# Altium PCB Badusb.PcbDoc
Units mm, origin at the board's own origin, x right, y up, seen from the top; angles counter-clockwise.
Board outline 20.91 x 42 mm, 2 copper layers (Top Layer, Bottom Layer); 5 components, 16 nets, 66 pads, 10 vias.
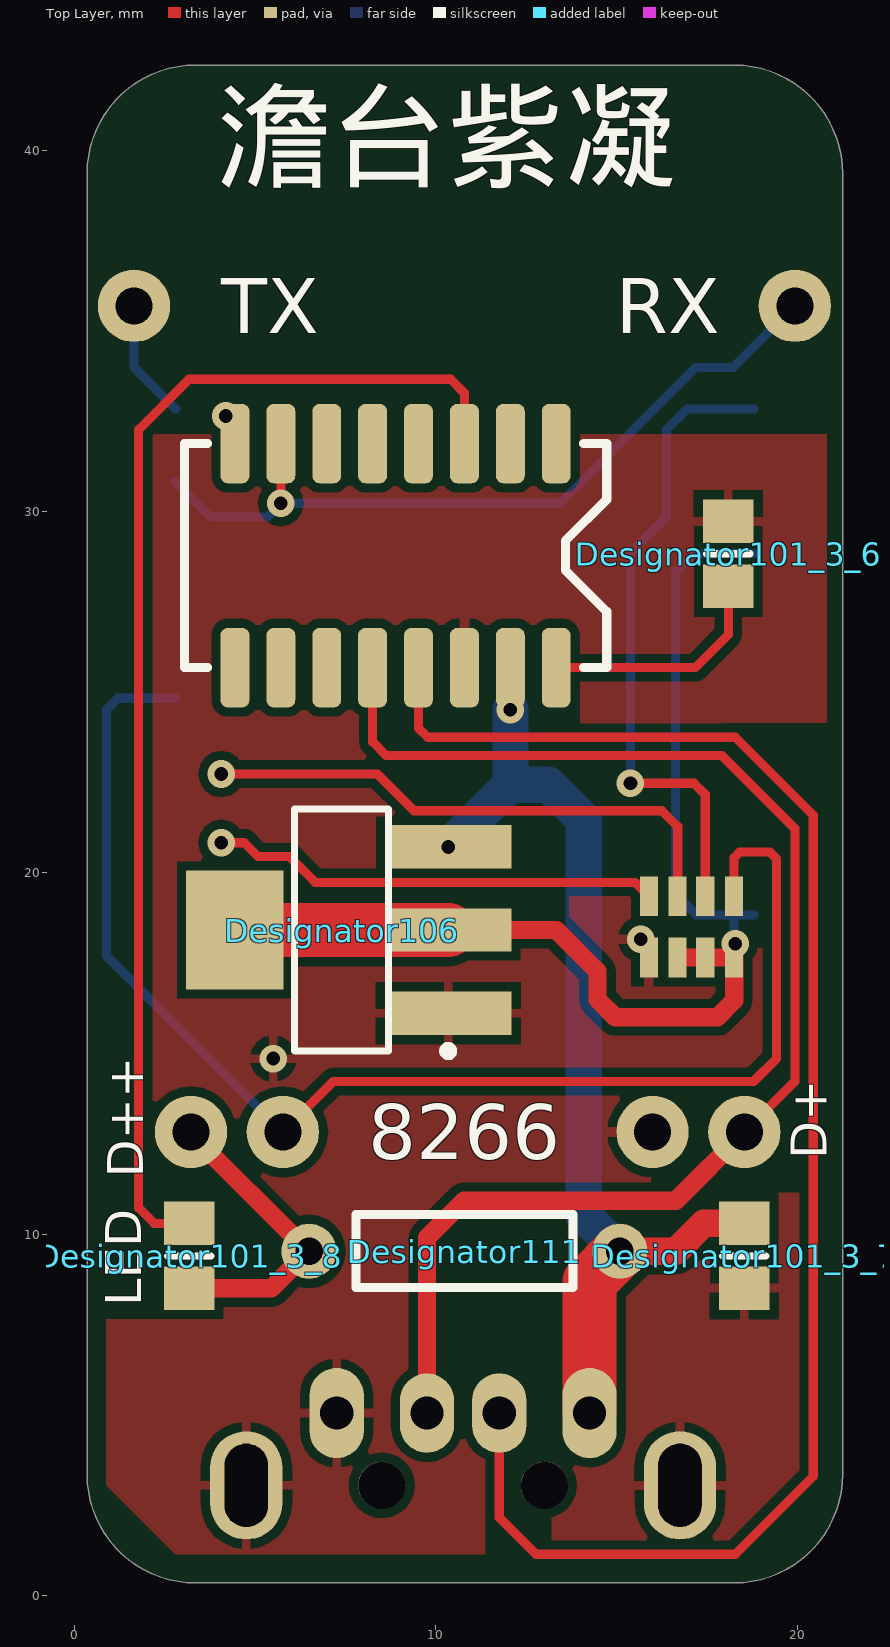
[diagram p0: Top Layer view]
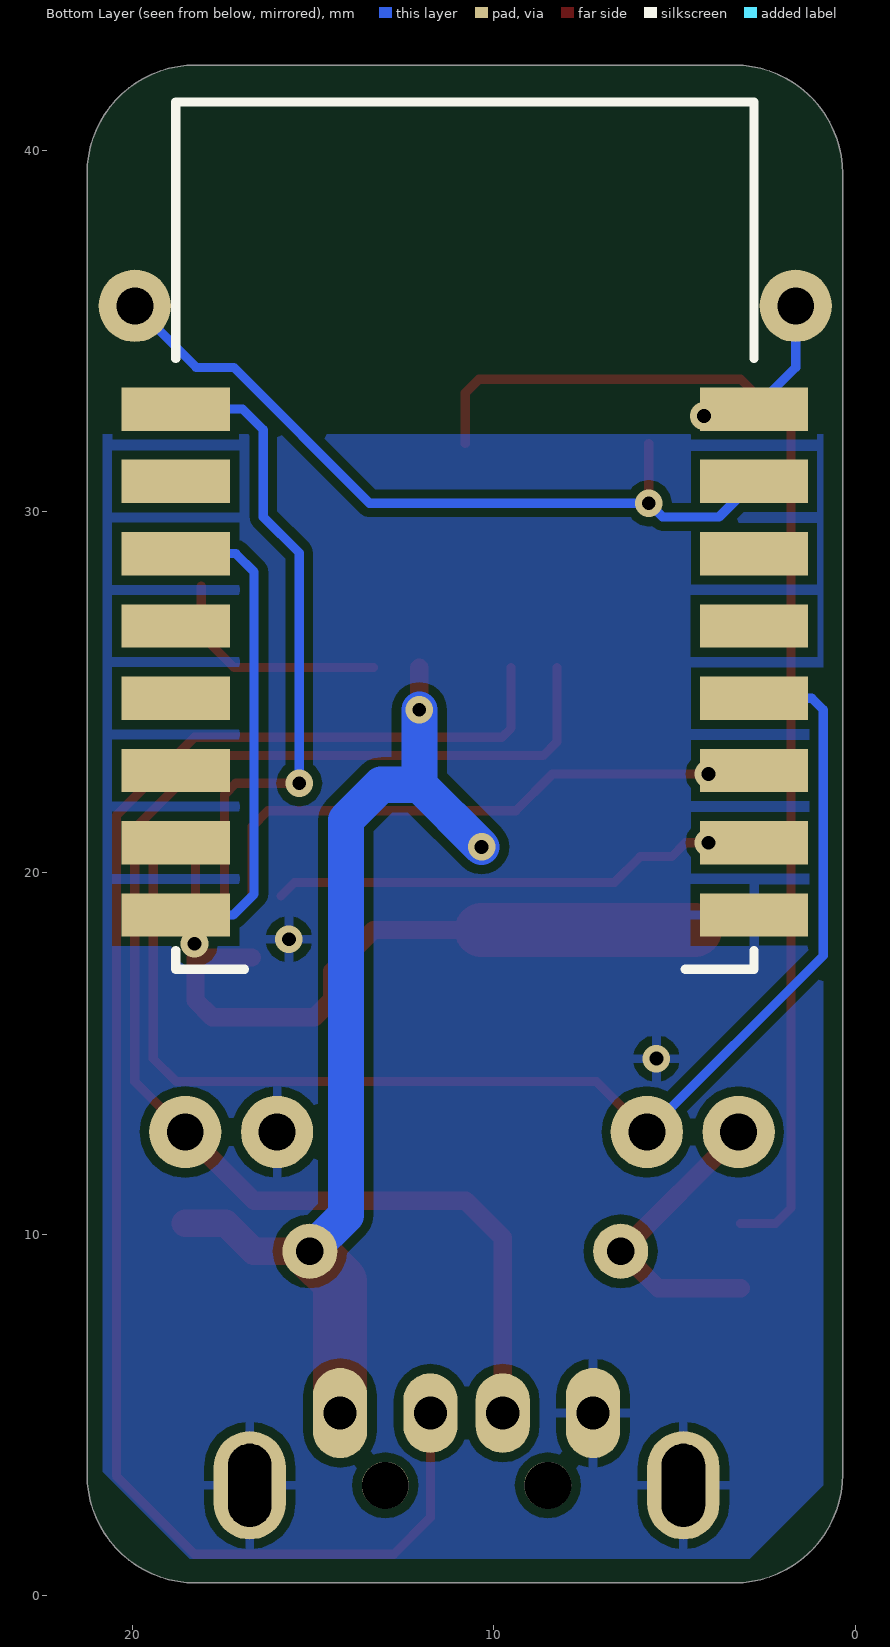
[diagram p1: Bottom Layer view, seen from below]

## Layer stack, top to bottom
Top Solder: solder mask 0.0102, Solder Resist, Dk 3.5
Top Layer: signal copper 0.0356
Dielectric 1: dielectric 0.32, FR-4, Dk 4.8
Bottom Layer: signal copper 0.0356
Bottom Solder: solder mask 0.0102, Solder Resist, Dk 3.5

## Board outline
0.354,3.349 0.354,39.349 cw(c3.354,39.349) 3.354,42.349 18.259,42.349 cw(c18.259,39.349) 21.259,39.349 21.259,3.349 cw(c18.259,3.349) 18.259,0.349 3.354,0.349 cw(c3.354,3.349)

## Design rules (kind name [scope] priority, off if disabled: settings)
Clearance [All] p1: gap=0.254 ignorepadtopadclearanceinfootprint=FALSE except(0: Arc-Hole Track-Hole SMDPad-Hole THPad-Hole Via-Hole Fill-Hole Poly-Hole Region-Hole Text-Hole)
PolygonConnect [All] p1: connectstyle=Relief reliefconductorwidth=0.254 reliefentries=4 polygonreliefangle="90 Angle" airgapwidth=0.254
RoutingVias [All] p1: holewidth=0.711 width=1.27 viastyle="Through Hole" minholewidth=0.711 minwidth=1.27 maxholewidth=0.711 maxwidth=1.27
SolderMaskExpansion [All] p1: expansion=0.102
Width [All] p1: maxlimit=2 minlimit=0.254 preferedwidth=0.508 minimp=50.000000 maximp=50.000000 favimp=50.000000
30 further rules are at their usual default settings.

## Components (designator, comment, footprint, x,y, rotation, side; value= is the part's Value field where it differs from the comment)
Designator101_3_6 "Comment" 6-0805_N 18.099,28.829 r270 top
Designator101_3_7 "Comment" 6-0805_N 18.542,9.398 r90 top
Designator101_3_8 "Comment" 6-0805_N 3.175,9.398 r270 top
Designator106 "Comment" SOT223_M 7.395,18.415 r180 top
Designator111 "Comment" R 10.795,9.525 r180 top

## Footprints (in the part's own frame and the unit in brackets; to place one, negate y for a bottom-side part, rotate by r counter-clockwise, add the part's x,y. Pads: shape width x height; smd on the part's side, far side on the other; paste and mask are expansions set on the pad)
6-0805_N [mm] "Chip Resistor, Body 2.0x1.2mm, IPC Medium Density"
  rect 1.2x1.4 smd: 1(-0.9,0) 2(0.9,0)
  silkscreen extent 0,-0.6 0,0.6, body extent -1.07,-0.7 1.07,0.7, height 0.7
R [mil]
  round 60 hole 30: 1(-169.29,0) 2(169.29,0)
  silkscreen extent -118,-40 118,39
SOT223_M [mm] "SOT223, 4-Leads, Body 6.5x3.5mm, Pitch 2.3mm, Lead Span 7mm, IPC Low Density"
  rect 3.5x1.2 smd: 1(-2.95,2.3) 2(-2.95,0) 3(-2.95,-2.3)
  rect 2.7x3.3 smd: 4(2.95,0)
  silkscreen extent -3.08,-3.35 1.3,3.47, body extent -1.85,-3.35 1.85,3.35, height 1.7

## Free pads (board coordinates)
  rect 3x1.2 smd far side: 1(2.806,18.83) 1(2.806,20.83) 1(2.806,22.83) 1(2.806,24.83) 1(2.806,26.83) 1(2.806,28.83) 1(2.806,30.83) 1(2.806,32.83) 1(18.806,18.83) 1(18.806,20.83) 1(18.806,22.83) 1(18.806,24.83) 1(18.806,26.83) 1(18.806,28.83) 1(18.806,30.83) 1(18.806,32.83)
  rrect50% 0.8x2.2 smd: 1(13.335,31.877) 2(12.065,31.877) 3(10.795,31.877) 4(9.525,31.877) 5(8.255,31.877) 6(6.985,31.877) 7(5.715,31.877) 8(4.445,31.877) 9(4.445,25.677) 10(5.715,25.677) 11(6.985,25.677) 12(8.255,25.677) 13(9.525,25.677) 14(10.795,25.677) 15(12.065,25.677) 16(13.335,25.677)
  rect 0.5x1.1 smd: 1(15.897,19.353) 1(16.697,19.353) 1(17.459,19.353) 1(18.259,19.353) 2(15.897,17.653) 2(16.697,17.653) 2(17.459,17.653) 2(18.259,17.653)
  round 2 hole 1.02: 13(1.651,35.687) 13(3.23,12.827) 13(5.77,12.827) 13(16.002,12.827) 13(18.542,12.827) 13(19.939,35.687)
  oval 2x3 hole 2.3 slot 1.2 at 0 deg: 62(16.759,3.048) 63(4.759,3.048)
  oval 1.5x2.5 hole 0.92: 65(7.259,5.048) 65(14.259,5.048)
  oval 1.5x2.2 hole 0.92: 65(9.759,5.048) 65(11.759,5.048)
  round 1.3 hole 1.3 unplated: 69(8.509,3.048) 70(13.009,3.048)

## Via types
v1: diameter 0.762, hole 0.381, Top Layer to Bottom Layer, tented both sides, 10 vias

## Nets (pads, with @x,y where several pads share a name; then routed paths per layer and width w, separated by ;. In a path a pad name is that pad's centre, name@x,y a point inside that pad or via, vN(x,y) a via of type N, cw(c..) or ccw(c..) an arc to the next point about the centre after c; other vN are vias at no path point)
3V3: Designator106.2 Designator106.4 pad.1@18.806,18.83 pad.1@18.806,28.83 pad.2@16.697,17.653 pad.2@17.459,17.653 pad.2@18.259,17.653 | length 32.7
  Top Layer w0.508: Designator106.2 13.335,18.415 14.478,17.272 14.478,16.492 14.968,16.002 17.798,16.002 18.259,16.463 18.259,17.653 17.459,17.653 pad.2@16.697,17.653
  Top Layer w1.5: Designator106.4 Designator106.2
  Bottom Layer w0.254: pad.1@18.259,18.796 18.259,18.034 v1(18.288,18.034) ; pad.1@18.806,18.83 17.22,18.83 16.637,19.413 16.637,28.321 17.146,28.83 pad.1@18.806,28.83
D+: pad.12 pad.13@18.542,12.827 pad.65@9.759,5.048 | length 38.6
  Top Layer w0.254: pad.12 8.255,23.622 8.636,23.241 17.921,23.241 19.939,21.223 19.939,14.224 pad.13@18.542,12.827
  Top Layer w0.508: pad.65@9.759,5.048 9.759,9.898 10.783,10.922 16.641,10.922 pad.13@18.599,12.88
D++: 
D-: pad.13@9.525,25.677 pad.65@11.759,5.048 | length 44.8
  Top Layer w0.254: pad.13@9.525,25.677 9.525,24.003 9.779,23.749 18.288,23.749 20.447,21.59 20.447,3.302 18.288,1.143 12.775,1.143 11.759,2.159 pad.65@11.759,5.048
GND: Designator101_3_6.1 Designator101_3_7.1 Designator106.1 pad.1@2.806,18.83 pad.2@15.897,17.653 pad.13@16.002,12.827 pad.14 pad.62 pad.63 pad.65@7.259,5.048
  other v1: 5.505,14.857 15.675,18.161
GPIO0: pad.1@2.806,24.83 pad.1@18.259,19.353 pad.13@5.77,12.827 | length 38.2
  Top Layer w0.254: pad.13@5.77,12.827 7.167,14.224 18.796,14.224 19.429,14.857 19.429,20.387 19.242,20.574 18.415,20.574 18.259,20.418 pad.1@18.259,19.353
  Bottom Layer w0.254: pad.1@2.806,24.83 1.208,24.83 0.889,24.511 0.889,17.708 pad.13@5.77,12.827
GPIO2: pad.1@2.806,22.83 pad.1@16.697,19.353 | length 15.2
  Top Layer w0.254: v1(4.064,22.733) 8.382,22.733 9.398,21.717 16.256,21.717 16.697,21.276 pad.1@16.697,19.353
GPIO15: pad.1@2.806,20.83 pad.1@15.897,19.353 | length 12.4
  Top Layer w0.254: v1(4.064,20.83) 4.701,20.83 5.085,20.446 5.953,20.446 6.665,19.734 15.516,19.734 pad.1@15.897,19.353
led: Designator101_3_8.2 Designator111.2 pad.13@3.23,12.827 | length 8.5
  Top Layer w0.508: Designator101_3_8.2 5.45,8.498 Designator111.2@6.477,9.525 ; pad.13@3.23,12.827 3.175,12.827 Designator111.2@6.477,9.525 ; Designator111.2@6.495,9.543 Designator111.2@6.477,9.525
pwm: Designator101_3_8.1 pad.3 | length 34.3
  Top Layer w0.254: Designator101_3_8.1 2.207,10.298 1.778,10.727 1.778,32.258 3.175,33.655 10.414,33.655 10.795,33.274 pad.3
RESET: pad.1@17.459,19.353 pad.1@18.806,32.83 | length 17.9
  Top Layer w0.254: v1(15.389,22.479) 17.145,22.479 17.459,22.165 pad.1@17.459,19.353
  Bottom Layer w0.254: v1(15.389,22.479) 15.389,28.851 16.383,29.845 16.383,32.258 16.955,32.83 pad.1@18.806,32.83
RST: pad.6
RX: pad.1@2.806,32.83 pad.8 pad.13@1.651,35.687 | length 3.3
  Bottom Layer w0.254: pad.13@1.651,35.687 1.651,33.985 pad.1@2.806,32.83
  other v1: 4.191,32.639
TX: pad.1@2.806,30.83 pad.7 pad.13@19.939,35.687 | length 21.6
  Top Layer w0.254: v1(5.715,30.226) pad.7
  Bottom Layer w0.254: pad.1@2.794,30.83 2.794,30.826 3.775,29.845 5.334,29.845 v1(5.715,30.226) 13.444,30.226 17.203,33.985 18.237,33.985 pad.13@19.939,35.687
V33: Designator101_3_6.2 pad.16 | length 6.5
  Top Layer w0.254: pad.16 17.186,25.677 18.099,26.59 Designator101_3_6.2
VCC: Designator101_3_7.2 Designator106.3 Designator111.1 pad.15 pad.65@14.259,5.048 | length 29.1
  Top Layer w0.508: v1(12.065,24.511) pad.15
  Top Layer w0.762: Designator111.1 16.649,9.525 17.422,10.298 Designator101_3_7.2
  Top Layer w1.5: pad.65@14.259,5.048 14.259,8.689 Designator111.1
  Bottom Layer w1: v1(10.345,20.715) 12.065,22.435 ; v1(12.065,24.511) 12.065,22.435 ; Designator111.1 14.097,10.523 14.097,21.463 13.125,22.435 12.065,22.435

## Polygon pours and split planes (outlines as drawn)
GND on Bottom Layer (solid, remove dead copper, pour order 2): 0.889,32.131 0.889,3.048 2.921,1.016 18.415,1.016 20.828,3.429 20.828,32.131
GND on Top Layer (solid, remove dead copper, pour order 0): 0.889,32.131 0.889,3.048 2.794,1.143 3.048,1.143 18.476,1.143 20.828,3.495 20.828,32.131

## Other copper
Top Layer:
  pour cut-out: 17.921,24.138 20.955,24.138 20.955,21.477
  pour cut-out: 12.128,2.812 13.101,2.812 13.246,2.667 13.208,2.629 13.208,1.016 13.168,1.016 11.962,2.222
  pour cut-out: 11.37,2.159 11.37,0.889 12.553,0.889
  pour cut-out: 20.059,11.148 20.059,13.922 17.721,11.269 17.842,11.148
  pour cut-out: 13.701,18.781 13.701,19.413 12.292,19.413 12.147,19.558 12.021,19.432 12.021,18.737
  pour cut-out: 13.998,25.289 13.998,24.138 13.989,24.13 12.274,24.13 12.274,25.233 12.262,25.246
  pour cut-out: 0.762,32.512 1.651,32.512 1.651,10.73 2.475,9.906 2.225,9.656 2.225,7.648 0.889,7.648
Bottom Layer:
  pour cut-out: 1.052,25.684 1.052,25.682 1.206,25.527 1.143,25.463 1.143,25.158 0.762,25.158 0.635,25.285 0.635,25.684

## Silkscreen, mask and mechanical layers (free items; w line width, h text height)
Top Overlay:
  lines w0.254: 3.683,25.677 3.048,25.677 3.048,31.877 3.683,31.877 ; 14.097,25.677 14.732,25.677 14.732,27.227 13.589,28.37 13.589,29.184 14.732,30.327 14.732,31.877 14.097,31.877
  text "澹台紫凝" at 3.937,38.481 h4
  text "TX" at 4.064,34.925 h1.52
  text "RX" at 14.986,34.925 h1.52
  text "8266" at 8.128,12.065 h1.52
  text "D+" at 20.828,12.065 h1 r90
  text "D++" at 1.905,11.557 h1 r90
  text "LED" at 1.85,8.001 h1 r90
Bottom Overlay:
  lines w0.254: 2.806,17.844 2.806,17.33 4.709,17.33 ; 2.806,34.227 2.806,41.33 18.806,41.33 18.806,34.227 ; 16.903,17.33 18.806,17.33 18.806,17.844
Mechanical 1:
  the board outline again, w0.254